# EAGLE board ServoIface_v1.0 (EAGLE 6.6.0)
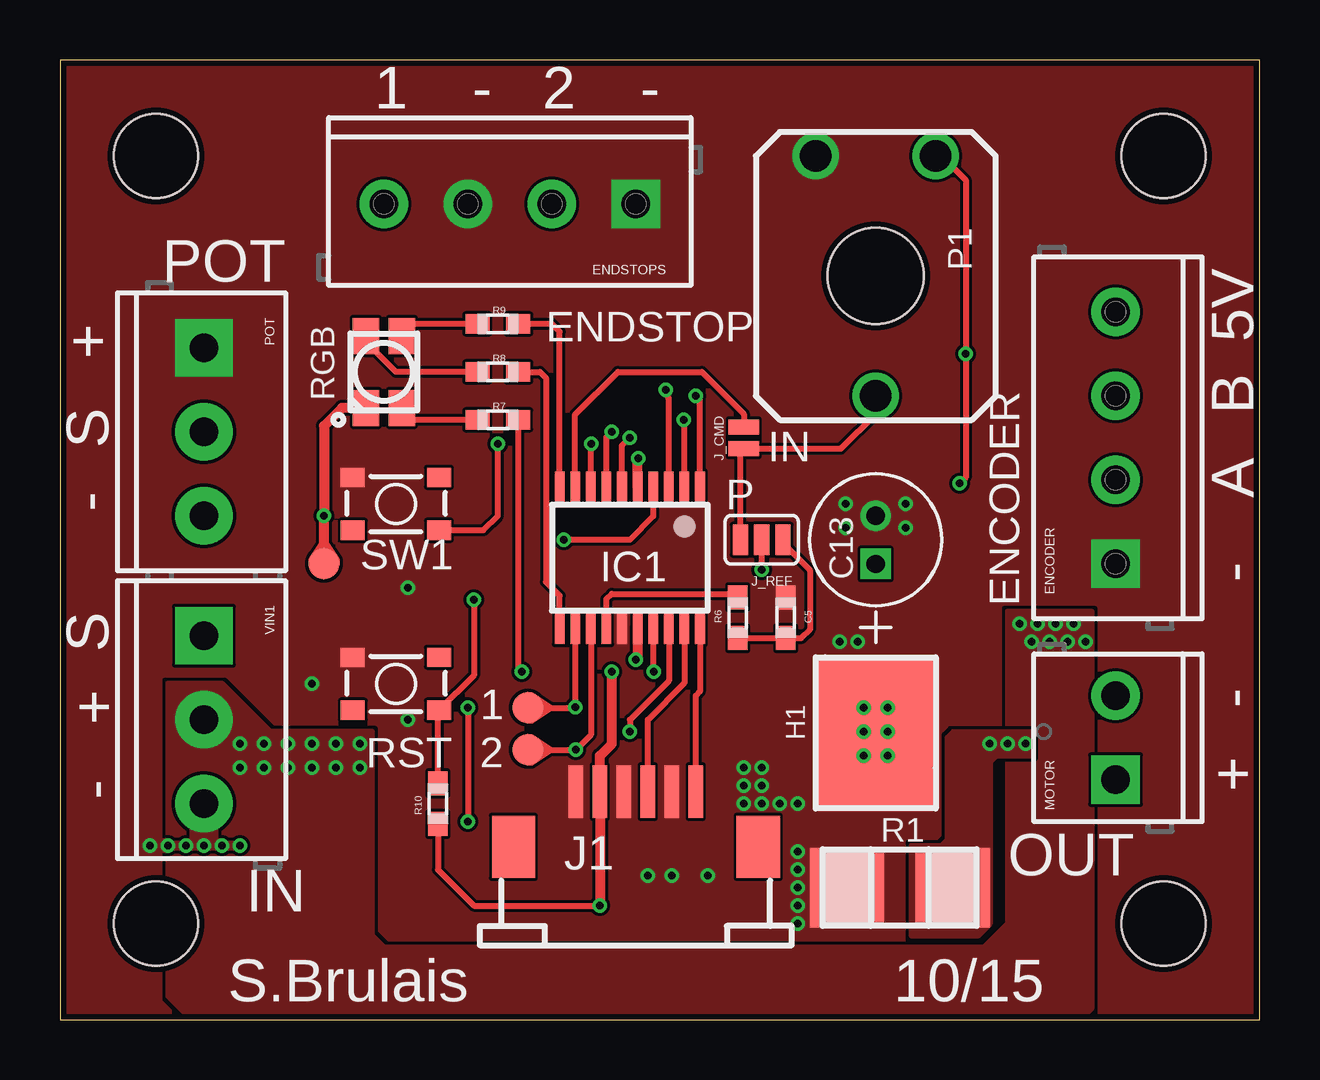
[diagram p0: board, top side]
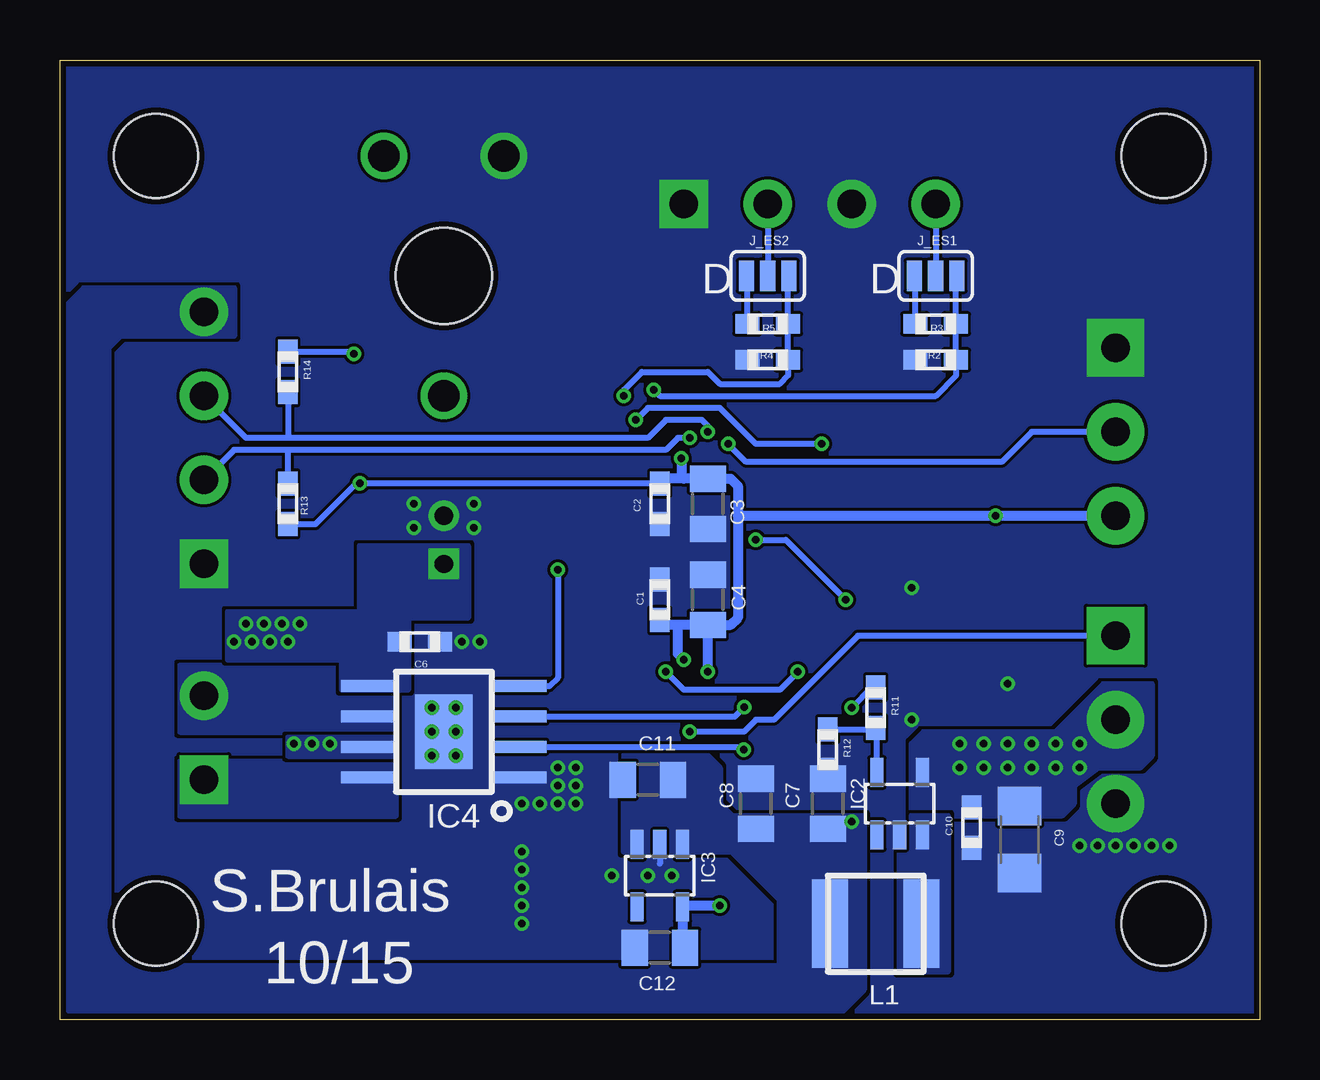
[diagram p1: board, bottom side, seen from below]

Size 50 x 40 mm. Coordinates in mm from the lower left corner, seen from the top.
Outline: 0,0 50,0 50,40 0,40 0,0
Copper layers (1*16): Top 0.035mm / dielectric 1.5mm / Bottom 0.035mm
Design rules "dirt_cheap_dirty_boards.v1 *": minimum track width 5mil, minimum drill 12mil, track to track 5mil, track to pad 5mil, pad to pad 5mil, via to via 5mil, smd to smd 0mil, copper to edge 10mil, drill to drill 10mil, minimum pad ring 10mil, minimum via ring 6mil, stop-mask expansion 2mil, vias tented up to drill 25mil, thermal gap 10mil
Holes 3.5 mm at 4,4 46,4 46,36 4,36

## Footprints (pad centres in the part's own frame; a part is rotated, then mirrored left to right if it is on the bottom)
R0603 = smd 1 x 0.8: 1 -0.85,0; 2 0.85,0
R0805 = smd 1.1 x 1.5: 1 -1.05,0; 2 1.05,0
1206 = smd 1.6 x 1.8: 1 -1.4,0; 2 1.4,0
CAPPR200-500X1600 = drill 0.762 square: 1 -2.007,0 | drill 0.762: 2 0,0
SCREWTERMINAL-3.5MM-4 = drill 1.2 pad 2.032 square: 1 0,0 | drill 1.2 pad 2.032: 2 3.5,0; 3 7,0; 4 10.5,0
HEAT_A5_SA = smd 5 x 6.3: P$1 0,0
TSSOP20 = smd 0.4 x 1.35: P$1 -2.925,-2.925; P$2 -2.275,-2.925; P$3 -1.625,-2.925; P$4 -0.975,-2.925; P$5 -0.325,-2.925; P$6 0.325,-2.925; P$7 0.975,-2.925; P$8 1.625,-2.925; P$9 2.275,-2.925; P$10 2.925,-2.925; P$11 2.925,2.925; P$12 2.275,2.925; P$13 1.625,2.925; P$14 0.975,2.925; P$15 0.325,2.925; P$16 -0.325,2.925; P$17 -0.975,2.925; P$18 -1.625,2.925; P$19 -2.275,2.925; P$20 -2.925,2.925
SOT23-5L = smd 0.55 x 1.2: 1 -0.95,-1.3; 2 0,-1.3; 3 0.95,-1.3; 4 0.95,1.3; 5 -0.95,1.3
HSOP_8P = smd 0.5 x 2.2: P$1 -1.905,-3.175; P$2 -0.635,-3.175; P$3 0.635,-3.175; P$4 1.905,-3.175; P$5 1.905,3.175; P$6 0.635,3.175; P$7 -0.635,3.175; P$8 -1.905,3.175 | smd 3.1 x 2.4: PAD 0,0
ZIF-06-1MM = smd 0.6 x 2.2: 1 -2.5,1; 2 -1.5,1; 3 -0.5,1; 4 0.5,1; 5 1.5,1; 6 2.5,1 | smd 1.8 x 2.6: H1 -5.1,-1.3; H2 5.1,-1.3
PAD-JUMPER-2-NO_NO_SILK = smd 0.635 x 1.27: 1 -0.45,0; 2 0.45,0
SJ_3 = smd 0.635 x 1.27: 1 -0.889,0; 2 0,0; 3 0.889,0
NRG_4026 = smd 1.5 x 3.7: P$1 -1.9,0; P$2 1.9,0
SCREWTERMINAL-3.5MM-2 = drill 1.2 pad 2.032 square: 1 0,0 | drill 1.2 pad 2.032: 2 3.5,0
POT_CB10 = drill 1.3: P$1 -2.5,-5; P$2 2.5,-5; P$3 0,5 | hole 4: 0,0
SCREWTERMINAL-3.5MM-3 = drill 1.2 pad 2.413 square: 1 0,0 | drill 1.2 pad 2.413: 2 3.5,0; 3 7,0
CRF2512 = smd 3.1 x 3.3: P$1 -2.2,0; P$2 2.2,0
PLCC4 = smd 1.1 x 1.5: P$1 -0.75,-1.5; P$2 -0.75,1.5; P$3 0.75,1.5; P$4 0.75,-1.5
TACTILE_SWITCH_SMD-3 = smd 1 x 0.8: 1 -1.8,1.1; 2 1.8,1.1; 3 -1.8,-1.1; 4 1.8,-1.1
TP_R04 = smd 1.3 x 1.3: P$1 0,0

## Placement (x,y rotation side)
C1  100nF  [R0603]  25,17.5 270 bottom
C2  10nF  [R0603]  25,21.5 90 bottom
C3  1uF  [R0805]  23,21.5 90 bottom
C4  4.7uF  [R0805]  23,17.5 270 bottom
C5  470nF  [R0603]  30.25,16.75 270 top
C6  100nF  [R0603]  35,15.75 180 bottom
C7  10uF  [R0805]  18,9 270 bottom
C8  10uF  [R0805]  21,9 270 bottom
C9  10uF  [1206]  10,7.5 90 bottom
C10  100nF  [R0603]  12,8 90 bottom
C11  1uF  [R0805]  25.5,10 0 bottom
C12  2.2uF  [R0805]  25,3 0 bottom
C13  47UF  [CAPPR200-500X1600]  34,21 90 top
ENCODER  [SCREWTERMINAL-3.5MM-4]  44,19 90 top
ENDSTOPS  [SCREWTERMINAL-3.5MM-4]  24,34 180 top
H1  HEAT_SINK  [HEAT_A5_SA]  34,12 0 top
IC1  STM32F042  [TSSOP20]  23.75,19.25 180 top
IC2  TPS560200  [SOT23-5L]  15,9 0 bottom
IC3  LP2980  [SOT23-5L]  25,6 180 bottom
IC4  DRV8870  [HSOP_8P]  34,12 90 bottom
J1  J_SWD  [ZIF-06-1MM]  24,8.5 0 top
J_CMD  [PAD-JUMPER-2-NO_NO_SILK]  28.5,24.25 270 top
J_ES1  [SJ_3]  13.5,31 0 bottom
J_ES2  [SJ_3]  20.5,31 0 bottom
J_REF  [SJ_3]  29.25,20 180 top
L1  [NRG_4026]  16,4 180 bottom
MOTOR  M023.5MM  [SCREWTERMINAL-3.5MM-2]  44,10 90 top
P1  TRIMPOTCB10  [POT_CB10]  34,31 180 top
POT  [SCREWTERMINAL-3.5MM-3]  6,28 270 top
R1  0.15  [CRF2512]  35,5.5 0 top
R2  4.7k  [R0603]  13.5,27.5 0 bottom
R3  [R0603]  13.5,29 180 bottom
R4  4.7k  [R0603]  20.5,27.5 0 bottom
R5  [R0603]  20.5,29 180 bottom
R6  330k  [R0603]  28.25,16.75 270 top
R7  [R0603]  18.25,25 180 top
R8  [R0603]  18.25,27 180 top
R9  [R0603]  18.25,29 180 top
R10  4.7k  [R0603]  15.75,9 270 top
R11  105k  [R0603]  16,13 90 bottom
R12  20k  [R0603]  18,11.25 90 bottom
R13  NC  [R0603]  40.5,21.5 270 bottom
R14  NC  [R0603]  40.5,27 90 bottom
RGB  LED-TRICOLOR  [PLCC4]  13.5,27 0 top
S1  [TACTILE_SWITCH_SMD-3]  14,21.5 0 top
S_RST  [TACTILE_SWITCH_SMD-3]  14,14 0 top
TP1  TEST_POINT_R04  [TP_R04]  19.5,13 180 top
TP2  TEST_POINT_R04  [TP_R04]  19.5,11.25 180 top
TP3  TEST_POINT_R04  [TP_R04]  11,19 270 top
VIN1  [SCREWTERMINAL-3.5MM-3]  6,16 270 top

## Library data of the parts
C1-C12 ENCODER ENDSTOPS H1 IC1-IC4 J1 J_ES1 J_ES2 J_REF L1 P1 POT R1-R14 RGB TP1-TP3 VIN1 = 0SBLib
C13 = 0SBLib; MPN: EEUFM1E470; OC_FARNELL: 1848386; OC_NEWARK: 17T5134; RATEDVOLTAGE: 25V; SUPPLIER: PANASONIC; TOLERANCE: ±20 %
J_CMD = SparkFun-Passives
MOTOR = SparkFun-Connectors
S1 S_RST = SparkFun-Electromechanical

## Nets
3.3V: C1.2 C2.2 C3.2 C4.2 C12.2 IC1.P$5 IC1.P$16 IC3.5 J1.2 P1.P$1 POT.3 R10.2 R13.2 R14.2 RGB.P$1 TP3.P$1
5V: C7.2 C8.2 C11.2 ENCODER.4 IC3.1 IC3.3 L1.P$2 R11.2
CMD_ANALOG: IC1.P$9 J_CMD.1
CMD_IN: IC1.P$18 VIN1.1
ENC_A: ENCODER.2 IC1.P$6 R13.1
ENC_B: ENCODER.3 IC1.P$7 R14.1
ENDSTOP_1: IC1.P$3 J_ES1.3 R2.2 R3.1
ENDSTOP_2: IC1.P$1 J_ES2.3 R4.2 R5.1
GND: C1.1 C2.1 C3.1 C4.1 C5.1 C6.1 C7.1 C8.1 C9.1 C10.1 C11.1 C12.1 C13.2 ENCODER.1 ENDSTOPS.1 ENDSTOPS.3 H1.P$1 IC1.P$15 IC2.2 IC3.2 IC4.P$1 IC4.PAD J1.1 J1.3 J1.5 P1.P$2 POT.1 R1.P$1 R2.1 R4.1 R12.1 S1.1 S_RST.1 VIN1.3
LED_B: IC1.P$11 R8.1
LED_G: IC1.P$10 R9.1
LED_R: IC1.P$17 R7.1
MOT+: IC4.P$8 MOTOR.1
MOT-: IC4.P$6 MOTOR.2
MOTOR_CUR_REF: IC1.P$14 R6.1
MOTOR_IN1: IC1.P$12 IC4.P$3 TP1.P$1
MOTOR_IN2: IC1.P$13 IC4.P$2 TP2.P$1
MOTOR_VREF: IC4.P$4 J_REF.2
N$1: IC4.P$7 R1.P$2
N$2: ENDSTOPS.2 J_ES2.2
N$3: J_ES2.1 R5.2
N$5: ENDSTOPS.4 J_ES1.2
N$6: J_ES1.1 R3.2
N$7: J_CMD.2 J_REF.3 P1.P$3
N$8: C5.2 J_REF.1 R6.2
N$9: R7.2 RGB.P$4
N$10: R8.2 RGB.P$2
N$11: R9.2 RGB.P$3
N$18: IC1.P$4 R10.1 S_RST.4
N$27: IC2.3 L1.P$1
N$29: IC2.5 R11.1 R12.2
POT_IN: IC1.P$8 POT.2
SW1: IC1.P$2 S1.4
SWCLK: IC1.P$20 J1.6
SWDIO: IC1.P$19 J1.4
VCC: C6.2 C9.2 C10.2 C13.1 IC2.4 IC4.P$5 VIN1.2

## Tracks (layer width: path | path; a pad name or v marks a point on that pad's centre or on a via)
3.3V  (via drill 0.3)
  Top 0.254: R10.2 15.75,6.25 17.25,4.75 v22.5,4.75 | v37.5,22.35 37.75,22.6 v37.75,27.75 37.75,35 36.75,36 P1.P$1
  Top 0.406: v22.5,4.75 J1.2 22.5,11 23,11.5 v23,14.5 | IC1.P$5 24.07,23.38 v24.1,23.4 | IC1.P$16 24.07,15.07 v24,15 | RGB.P$1 11.75,25.5 11,24.75 v11,21 TP3.P$1
  Bottom 0.254: C2.2 v37.5,22.35 37.65,22.35 39.35,20.65 R13.2 | R14.2 37.85,27.85 v37.75,27.75
  Bottom 0.406: v22.5,4.75 24,4.75 IC3.5 24.05,3.1 C12.2 | v23,14.5 C4.2 | C4.2 24.25,16.45 | 24.25,16.45 24.8,16.45 C1.2 | 21.75,21 21.75,22.25 22.05,22.55 C3.2 24,22.55 | 21.75,21 21.75,16.75 22.05,16.45 C4.2 | 24,22.55 24.8,22.55 C2.2 | v24.1,23.4 24.1,22.65 24,22.55 | v24,15 24.25,15.25 24.25,16.45 | POT.3 v11,21 21.75,21
5V  (via drill 0.3)
  Top 0.254: v17,13 v17,8.25
  Bottom 0.254: R11.2 16.15,13.85 v17,13
  pour Bottom (rank 3, no thermals): 16.5,8.5 16.5,2 20,2 20,5 22,7 26.5,7 26.5,11 23,11 22.5,10.5 22.5,9 22,8.5
  pour Bottom (rank 2, no thermals): 16.5,2.25 16.5,1.25 17.5,0.25 49.5,0.25 50,0.75 50,29.5 49,30.5 42.75,30.5 42.75,28.5 47.5,28.5 48,28 48,3.5 46.75,2.25
CMD_ANALOG
  Top 0.254: IC1.P$9 21.48,25.23 23.25,27 26.75,27 28.5,25.25 J_CMD.1
CMD_IN  (via drill 0.3)
  Top 0.254: IC1.P$18 25.38,14.12 23.75,12.5 v23.75,12
  Bottom 0.254: VIN1.1 16.75,16 20.25,12.5 21,12.5 21.5,12 v23.75,12
ENC_A  (via drill 0.3)
  Top 0.254: IC1.P$6 23.43,23.93 v23.75,24.25
  Bottom 0.254: v23.75,24.25 24.25,24.25 24.75,23.75 40.5,23.75 | 40.5,23.75 42.75,23.75 ENCODER.2 | R13.1 40.5,23.75
ENC_B  (via drill 0.3)
  Top 0.254: IC1.P$7 22.77,24.27 v23,24.5
  Bottom 0.254: v23,24.5 23,24.75 23.25,25 24.75,25 25.5,24.25 40.5,24.25 | 40.5,24.25 42.25,24.25 ENCODER.3 | R14.1 40.5,24.25
ENDSTOP_1  (via drill 0.3)
  Top 0.254: IC1.P$3 25.38,25.88 v25.25,26.25
  Bottom 0.254: J_ES1.3 12.65,30.96 R3.1 R2.2 12.65,26.85 13.5,26 25,26 v25.25,26.25
ENDSTOP_2  (via drill 0.3)
  Top 0.254: IC1.P$1 26.68,25.82 v26.5,26
  Bottom 0.254: J_ES2.3 19.65,30.96 R5.1 R4.2 19.65,26.85 20,26.5 22.5,26.5 23,27 25.75,27 26.5,26.25 v26.5,26
GND  (via drill 0.3)
  Bottom 0.254: IC3.2 25,6.5
  other vias: 30.75,7 30.75,6.25 30.75,5.5 30.75,4.75 30.75,4 33.25,15.75 32.5,15.75 32.75,21.5 32.75,20.5 35.25,20.5 35.25,21.5 29.25,10.5 28.5,10.5 28.5,9.75 29.25,9.75 28.5,9 29.25,9 30,9 30.75,9 24.5,6 25.5,6 27,6 14.5,12.5 10.5,14 14.5,18 6,7.25 6.75,7.25 5.25,7.25 4.5,7.25 7.5,7.25 3.75,7.25
  pour Bottom (rank 5, no thermals): 0,40 50,40 50,0 0,0
  pour Top (rank 5, no thermals): 0,40 50,40 50,0 0,0
LED_B
  Top 0.254: R8.1 20,27 20.25,26.75 20.25,18.25 20.82,17.68 IC1.P$11
LED_G
  Top 0.254: IC1.P$10 20.82,28.68 20.5,29 R9.1
LED_R  (via drill 0.3)
  Top 0.254: R7.1 19.1,14.65 v19.25,14.5 | IC1.P$17 24.73,14.53 v24.75,14.5
  Bottom 0.254: v19.25,14.5 20,13.75 24,13.75 v24.75,14.5
MOT+
  pour Bottom (rank 3, no thermals): 36,10.75 45,10.75 45,8.5 36,8.5
MOT-
  pour Bottom (rank 3, no thermals): 36,13.5 38.5,13.5 38.5,14.75 45,14.75 45,12 36,12
MOTOR_CUR_REF
  Top 0.254: IC1.P$14 22.77,17.52 23,17.75 28.1,17.75 R6.1
MOTOR_IN1  (via drill 0.3)
  Top 0.254: IC1.P$12 v21.48,13.03 21.48,13.22 21.25,13 TP1.P$1
  Bottom 0.254: IC4.P$3 21.86,12.63 v21.48,13.03
MOTOR_IN2  (via drill 0.3)
  Top 0.254: TP2.P$1 v21.5,11.25 22.12,11.88 IC1.P$13
  Bottom 0.254: IC4.P$2 21.64,11.37 v21.5,11.25
MOTOR_VREF  (via drill 0.3)
  Top 0.254: v29.25,18.75 J_REF.2
  Bottom 0.254: IC4.P$4 29.59,13.9 29.25,14.25 v29.25,18.75
N$1  (via drill 0.3)
  other vias: 38.75,11.5 39.5,11.5 40.25,11.5
  pour Bottom (rank 2, no thermals): 36,11.75 40.5,11.75 40.5,11 36,11
  pour Top (rank 2, no thermals): 35.5,7.25 36.75,7.25 37,7.5 37,11.75 37.25,12 40.5,12 40.5,11 39,11 38.75,10.75 38.75,4 38.25,3.5 35.5,3.5
N$2
  Bottom 0.254: ENDSTOPS.2 J_ES2.2
N$3
  Bottom 0.254: R5.2 21.35,30.96 J_ES2.1
N$5
  Bottom 0.254: ENDSTOPS.4 J_ES1.2
N$6
  Bottom 0.254: R3.2 14.35,30.96 J_ES1.1
N$7
  Top 0.254: J_REF.3 28.36,23.66 J_CMD.2 32.55,23.8 34,25.25 P1.P$3
N$8
  Top 0.254: R6.2 C5.2 30.9,15.9 31.25,16.25 31.25,18.75 30.14,19.86 J_REF.1
N$9
  Top 0.254: R7.2 14.75,25 RGB.P$4
N$10
  Top 0.254: R8.2 14,27 12.75,28.25 RGB.P$2
N$11
  Top 0.254: R9.2 14.75,29 RGB.P$3
N$12  (via drill 0.3)
  other vias: 33.5,11
N$13  (via drill 0.3)
  other vias: 34.5,11
N$14  (via drill 0.3)
  other vias: 33.5,12
N$15  (via drill 0.3)
  other vias: 34.5,12
N$16  (via drill 0.3)
  other vias: 34.5,13
N$17  (via drill 0.3)
  other vias: 33.5,13
N$18  (via drill 0.3)
  Top 0.254: R10.1 15.75,12.85 S_RST.4 17.25,14.35 v17.25,17.5 | IC1.P$4 24.73,20.98 23.75,20 v21,20
  Bottom 0.254: v21,20 19.75,20 v17.25,17.5
N$27
  pour Bottom (rank 2, no thermals): 13,8.5 13,2 15,2 15,7 14.5,7.5 14.5,8.5
N$29
  Bottom 0.254: IC2.5 15.95,12.1 R11.1 16.05,12.1 R12.2
POT_IN  (via drill 0.3)
  Top 0.254: IC1.P$8 22.12,23.88 v22.15,24
  Bottom 0.254: POT.2 9.5,24.5 10.75,23.25 21.4,23.25 v22.15,24
SW1  (via drill 0.3)
  Top 0.254: S1.4 17.65,20.4 18.25,21 v18.25,24 | IC1.P$2 26.02,24.98 v26,25
  Bottom 0.254: v18.25,24 21,24 22.5,25.5 25.5,25.5 v26,25
SWCLK
  Top 0.254: J1.6 26.5,13.5 26.68,13.68 IC1.P$20
SWDIO
  Top 0.254: J1.4 24.5,12.5 26.02,14.03 IC1.P$19
VCC  (via drill 0.3)
  other vias: 10.5,11.5 11.5,11.5 12.5,11.5 10.5,10.5 11.5,10.5 12.5,10.5 9.5,11.5 8.5,11.5 7.5,11.5 7.5,10.5 8.5,10.5 9.5,10.5 40,16.5 40.75,16.5 41.5,16.5 42.25,16.5 42.75,15.75 42,15.75 41.25,15.75 40.5,15.75
  pour Bottom (rank 3, no thermals): 4.5,14 4.5,11 5,10.5 6.75,10.5 7.75,9.75 7.75,9 8.25,8.5 14.5,8.5 14.5,11.5 14,12 8.5,12 6.5,14
  pour Top (rank 3, no thermals): 4.5,12 4.5,1 5.5,0 42.5,0 43,0.5 43,17 39.5,17 39.5,4 38.5,3 13.5,3 13,3.5 13,12 8.75,12 6.75,14 4.5,14
  pour Bottom (rank 2, no thermals): 35.5,16.75 35.5,13.75 38.25,13.75 38.25,15 43,15 43,17 37.5,17 37.5,19.75 33,19.75 33,16.75

## Text on the board
tPlace: 1 | - | 2 | - | POT | + | ENDSTOP | 5V | S | B | IN | - | A | P | SW1 | - | S | ENCODER | + | - | 1 | - | RST | 2 | + | OUT | IN | S.Brulais | 10/15
bPlace: D | D | S.Brulais | 10/15